# Altium PCB adua.PcbDoc
Units mm, origin at the board's own origin, x right, y up, seen from the top; angles counter-clockwise.
Board outline 234.8 x 151.35 mm, 2 copper layers (Top Layer, Bottom Layer); 68 components, 82 nets, 314 pads, 0 vias.
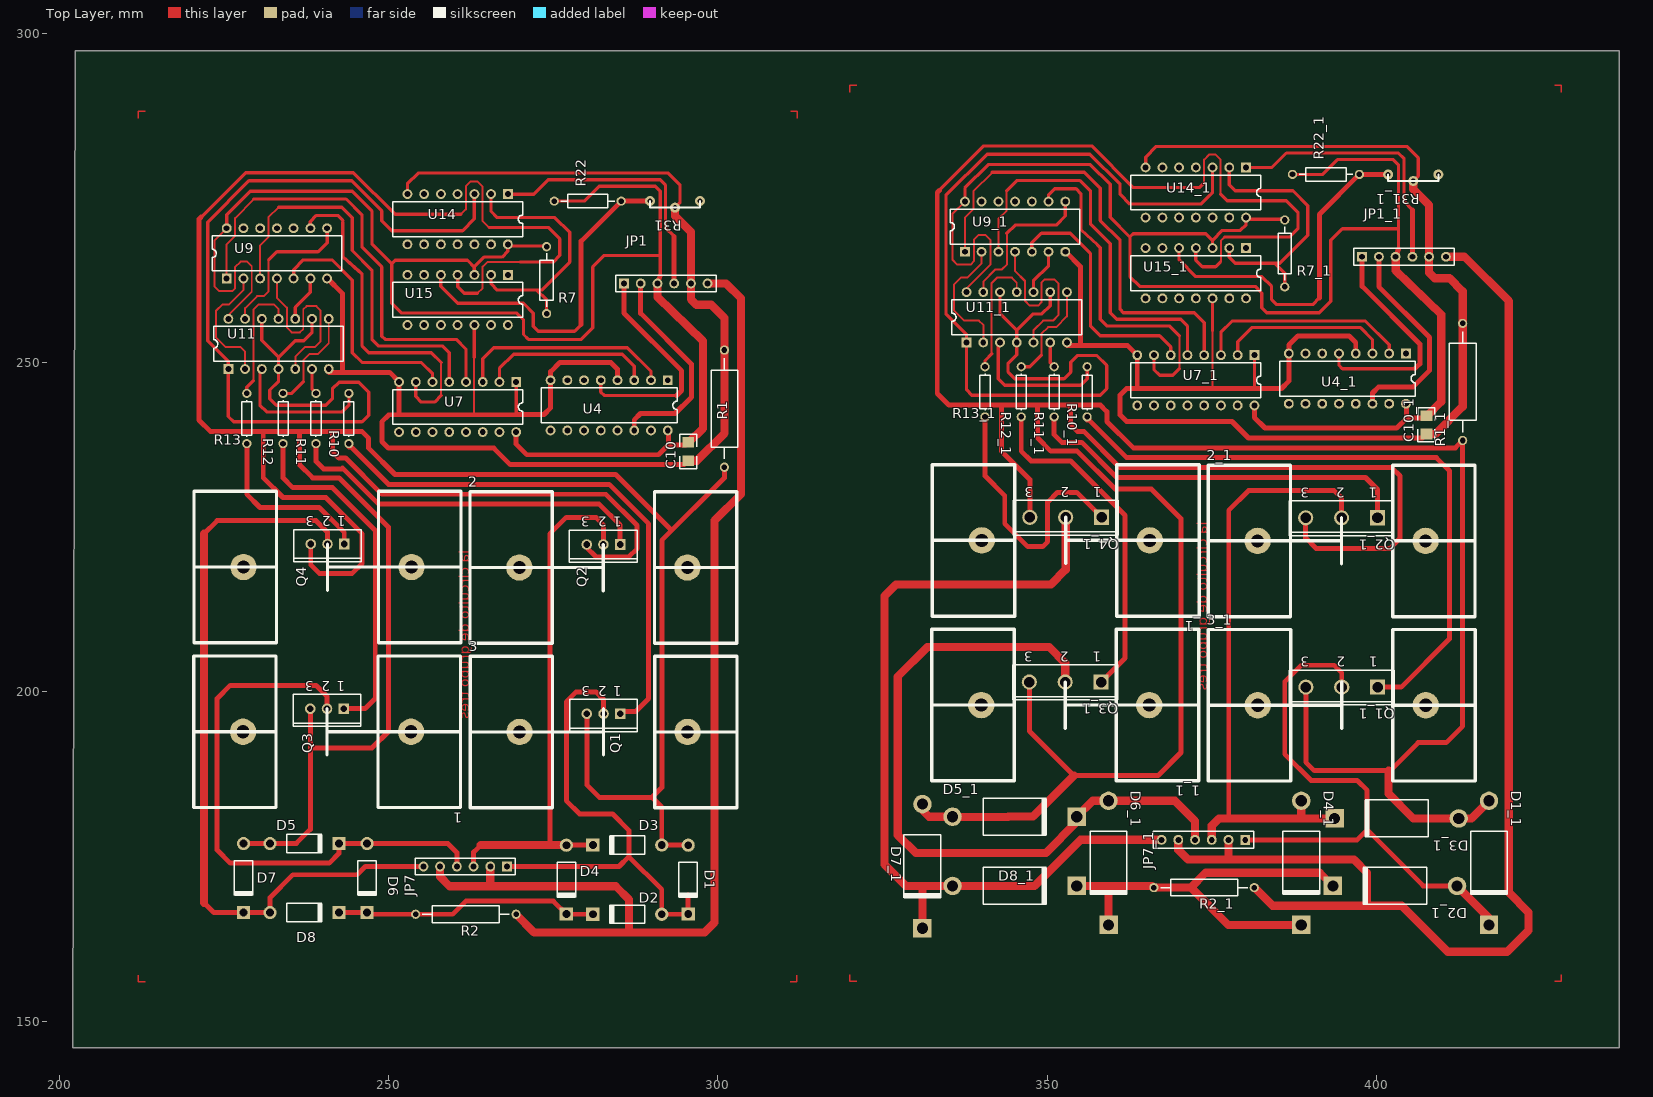
[diagram p0: Top Layer view]
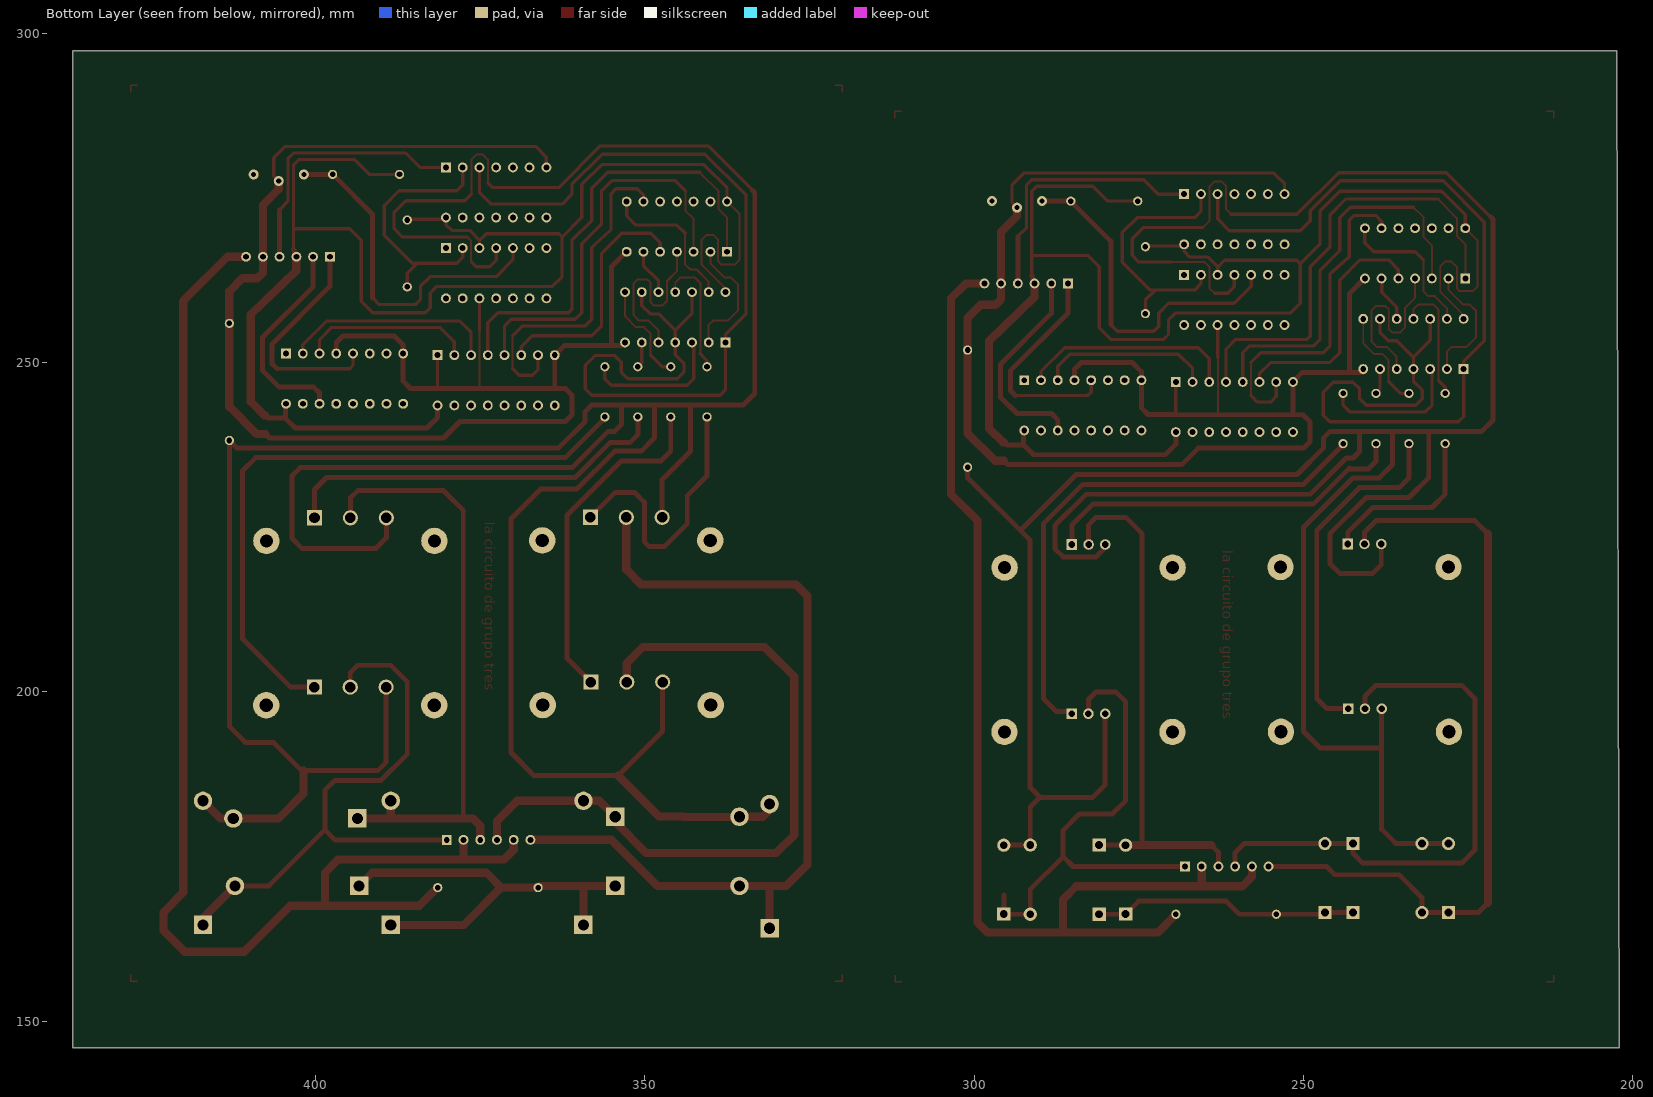
[diagram p1: Bottom Layer view, seen from below]

## Layer stack, top to bottom
Top Layer: signal copper 0.0356
Dielectric: dielectric 0.32, FR-4, Dk 4.8
Bottom Layer: signal copper 0.0356

## Board outline
202.45,297.35 436.85,297.35 436.85,146 202.05,146

## Design rules (kind name [scope] priority, off if disabled: settings)
Clearance [All] p1: gap=0.254
ComponentClearance [All] p1: gap=0.254 collisioncheckmode=0
PolygonConnect [All] p1: connectstyle=Relief reliefconductorwidth=0.254 reliefentries=4 polygonreliefangle="90 Angle"
RoomDefinition Driver [InComponentClass('Driver')] p1: confinementstyle=ConfineIn formatcopy=TRUE outline 225.262,383.686 276.062,383.686 276.062,409.086 225.262,409.086
RoutingLayers [All] p1: top layer=Any bottom layer="Not Used"
RoutingVias [All] p1: holewidth=0.711 width=1.27 viastyle="Through Hole" minholewidth=0.711 minwidth=1.27 maxholewidth=0.711 maxwidth=1.27
SolderMaskExpansion [All] p1: expansion=0.102
TestPointUsage [All] p1: valid=0 allowmultiple=FALSE
Testpoint [All] p1: side=15 testpointundercomponent=TRUE minsize=1.016 maxsize=2.54 preferedsize=1.524 minholesize=0 maxholesize=1.016 preferedholesize=0.813 testpointgrid=0.025 style=1023 order=-539222988
Width [All] p1: maxlimit=25 minlimit=0.254 preferedwidth=0.254 toplayer_prefwidth=0.5 bottomlayer_maxwidth=2.54 minimp=50.000000 maximp=50.000000 favimp=50.000000
16 further rules are at their usual default settings.

## Classes and differential pairs
component class Driver: B1A B1B B2A B2B B3A B3B C1 C4 C5 C11 C12 D1 D2 D3 D4 D5 D6 D7 D8 JP1 JP4 JP7 Q1 Q2 Q3 Q4 R1 R2 R7 R9 R10 R11 R13 R25 R26 R27 R28 R29 R30 R31 R34 S1 U1 U4 U7 U9 U11 U14 U15 U16 U? X1

## Components (designator, comment, footprint, x,y, rotation, side; value= is the part's Value field where it differs from the comment)
1 "" "Heat Sink" 263.425,203.95 r180 top
1_1 "" "Heat Sink" 375.475,208 r180 top
2 "" "Heat Sink" 259.875,208.875 r0 top
2_1 "" "Heat Sink" 371.925,212.925 r0 top
3 "" "Heat Sink" 259.9,183.925 r0 top
3_1 "" "Heat Sink" 371.95,187.975 r0 top
_1 "" "Heat Sink" 375.55,233 r180 top
C10 "XTAL" C3216-1206 295.5,236.5 r90 top
C10_1 "XTAL" C3216-1206 407.55,240.55 r90 top
D1 "1N4004" DIO10.46-5.3x2.8 295.5,171.5 r270 top
D1_1 "" DIO18.84-9.6x5.6 417.05,174.05 r270 top
D2 "1N4004" DIO10.46-5.3x2.8 286.25,166.25 r180 top
D2_1 "" DIO18.84-9.6x5.6 402.78,170.55 r180 top
D3 "1N4004" DIO10.46-5.3x2.8 286.25,176.75 r180 top
D3_1 "" DIO18.84-9.6x5.6 403.03,180.8 r180 top
D4 "1N4004" DIO10.46-5.3x2.8 277,171.5 r270 top
D4_1 "" DIO18.84-9.6x5.6 388.55,174.05 r270 top
D5 "1N4004" DIO10.46-5.3x2.8 237.25,176.98 r0 top
D5_1 "" DIO18.84-9.6x5.6 345.05,181.05 r0 top
D6 "1N4004" DIO10.46-5.3x2.8 246.75,171.75 r270 top
D6_1 "" DIO18.84-9.6x5.6 359.3,174.05 r270 top
D7 "1N4004" DIO10.46-5.3x2.8 228,171.75 r270 top
D7_1 "" DIO18.84-9.6x5.6 331.05,173.55 r270 top
D8 "1N4004" DIO10.46-5.3x2.8 237.25,166.5 r0 top
D8_1 "" DIO18.84-9.6x5.6 345.05,170.55 r0 top
JP1 "Header 6" HDR1X6 285.75,262 r0 top
JP1_1 "Header 6" HDR1X6 397.8,266.05 r0 top (schematic designator JP1)
JP7 "Header 6" HDR1X6 268,173.5 r180 top
JP7_1 "Header 6" HDR1X6 380.05,177.55 r180 top (schematic designator JP7)
Q1 "MJE15030" SFM-T3/X1.6V 282.65,196.675 r180 top
Q1_1 "" SFM-F3/Y2.3 394.7,200.725 r180 top
Q2 "MJE15030" SFM-T3/X1.6V 282.625,222.375 r180 top
Q2_1 "" SFM-F3/Y2.3 394.675,226.425 r180 top
Q3 "MJE15030" SFM-T3/X1.6V 240.675,197.45 r180 top
Q3_1 "" SFM-F3/Y2.3 352.725,201.5 r180 top
Q4 "MJE15030" SFM-T3/X1.6V 240.75,222.45 r180 top
Q4_1 "" SFM-F3/Y2.3 352.8,226.5 r180 top
R1 "" AXIAL-0.7 301,243 r90 top
R1_1 "" AXIAL-0.7 413.05,247.05 r90 top
R2 "" AXIAL-0.6 261.75,166.25 r0 top
R2_1 "" AXIAL-0.6 373.8,170.3 r0 top
R7 "" AXIAL-0.4 274,262.5 r90 top
R7_1 "" AXIAL-0.4 386.05,266.55 r90 top
R10 "1K" AXIAL-0.3 244,241.5 r270 top
R10_1 "1K" AXIAL-0.3 356.05,245.55 r270 top (schematic designator R10)
R11 "1K" AXIAL-0.3 239,241.5 r270 top
R11_1 "1K" AXIAL-0.3 351.05,245.55 r270 top (schematic designator R11)
R12 "1K" AXIAL-0.3 234,241.5 r270 top (schematic designator R11)
R12_1 "1K" AXIAL-0.3 346.05,245.55 r270 top (schematic designator R11)
R13 "Res1" AXIAL-0.3 228.5,241.5 r90 top
R13_1 "Res1" AXIAL-0.3 340.55,245.55 r90 top (schematic designator R13)
R22 "" AXIAL-0.4 280.25,274.5 r180 top
R22_1 "" AXIAL-0.4 392.3,278.55 r180 top
R31 "" "Var res" 293.5,273.5 r180 top
R31_1 "" "Var res" 405.55,277.55 r180 top
U4 "DM74LS191N" DIP-16 283.5,243.5 r180 top
U4_1 "DM74LS191N" DIP-16 395.55,247.55 r180 top (schematic designator U4)
U7 "SN74LS139AN" DIP-16/X1.5 260.5,243.25 r180 top
U7_1 "SN74LS139AN" DIP-16/X1.5 372.55,247.3 r180 top (schematic designator U7)
U9 "SN74LS04N" DIP-14/D19.7 233.068,266.568 r0 top
U9_1 "SN74LS04N" DIP-14/D19.7 345.118,270.618 r0 top (schematic designator U9)
U11 "SN74LS08N" DIP-14/D19.7 233.318,252.818 r0 top
U11_1 "SN74LS08N" DIP-14/D19.7 345.368,256.868 r0 top (schematic designator U11)
U14 "SN74LS08N" DIP-14/D19.7 260.5,271.75 r180 top
U14_1 "SN74LS08N" DIP-14/D19.7 372.55,275.8 r180 top (schematic designator U14)
U15 "LM339N" DIP-14/D19.7 260.5,259.5 r180 top
U15_1 "LM339N" DIP-14/D19.7 372.55,263.55 r180 top (schematic designator U15)
? "" "Heat Sink" 263.5,228.95 r180 top

## Footprints (in the part's own frame and the unit in brackets; to place one, negate y for a bottom-side part, rotate by r counter-clockwise, add the part's x,y. Pads: shape width x height; smd on the part's side, far side on the other; paste and mask are expansions set on the pad)
AXIAL-0.3 [mm]
  round 1.4 hole 0.85: 1(-3.81,0) 2(3.81,0)
  silkscreen extent -2.77,-0.76 2.77,0.76
AXIAL-0.4 [mm]
  round 1.4 hole 0.85: 1(-5.08,0) 2(5.08,0)
  silkscreen extent -4.06,-1.02 4.06,1.02
AXIAL-0.6 [mm]
  round 1.4 hole 0.85: 1(-7.62,0) 2(7.62,0)
  silkscreen extent -6.6,-1.27 6.6,1.27
AXIAL-0.7 [mm]
  round 1.4 hole 0.85: 1(-8.89,0) 2(8.89,0)
  silkscreen extent -7.62,-2.03 7.62,2.03
C3216-1206 [mm]
  rect 1.6x1.8 smd: 1(-1.4,0) 2(1.4,0)
  silkscreen extent -2.6,-1.3 2.6,1.3
DIO10.46-5.3x2.8 [mm]
  round 2 hole 1.2: 1(-5.23,0)
  rect 2x2 hole 1.2: 2(5.23,0)
  silkscreen extent -2.65,-1.4 2.75,1.4
DIO18.84-9.6x5.6 [mm]
  round 2.8 hole 1.7: 1(-9.42,0)
  rect 2.8x2.8 hole 1.7: 2(9.42,0)
  silkscreen extent -4.8,-2.8 4.9,2.8
DIP-14/D19.7 [mm]
  rect 1.5x1.5 hole 0.9: 1(-7.62,-3.81)
  round 1.5 hole 0.9: 2(-5.08,-3.81) 3(-2.54,-3.81) 4(0,-3.81) 5(2.54,-3.81) 6(5.08,-3.81) 7(7.62,-3.81) 8(7.62,3.81) 9(5.08,3.81) 10(2.54,3.81) 11(0,3.81) 12(-2.54,3.81) 13(-5.08,3.81) 14(-7.62,3.81)
  silkscreen extent -9.85,-2.65 9.85,2.65
DIP-16 [mm]
  rect 1.5x1.5 hole 0.9: 1(-8.89,-3.81)
  round 1.5 hole 0.9: 2(-6.35,-3.81) 3(-3.81,-3.81) 4(-1.27,-3.81) 5(1.27,-3.81) 6(3.81,-3.81) 7(6.35,-3.81) 8(8.89,-3.81) 9(8.89,3.81) 10(6.35,3.81) 11(3.81,3.81) 12(1.27,3.81) 13(-1.27,3.81) 14(-3.81,3.81) 15(-6.35,3.81) 16(-8.89,3.81)
  silkscreen extent -10.3,-2.65 10.3,2.65
DIP-16/X1.5 [mm]
  rect 1.5x1.5 hole 0.9: 1(-8.89,-3.81)
  round 1.5 hole 0.9: 2(-6.35,-3.81) 3(-3.81,-3.81) 4(-1.27,-3.81) 5(1.27,-3.81) 6(3.81,-3.81) 7(6.35,-3.81) 8(8.89,-3.81) 9(8.89,3.81) 10(6.35,3.81) 11(3.81,3.81) 12(1.27,3.81) 13(-1.27,3.81) 14(-3.81,3.81) 15(-6.35,3.81) 16(-8.89,3.81)
  silkscreen extent -9.85,-2.65 9.85,2.65
HDR1X6 [mm]
  rect 1.5x1.5 hole 0.9: 1(0,0)
  round 1.5 hole 0.9: 2(2.54,0) 3(5.08,0) 4(7.62,0) 5(10.16,0) 6(12.7,0)
  silkscreen extent -1.27,-1.27 13.97,1.27
"Heat Sink" [mm]
  round 4 hole 2: 0(35.5,10) 2(10,10)
  silkscreen extent 2.5,-1.5 43,21.5
SFM-F3/Y2.3 [mm]
  rect 2.3x2.3 hole 1.6: 1(-5.45,0)
  round 2.3 hole 1.6: 2(0,0) 3(5.45,0)
  silkscreen extent -7.95,-2.6 7.95,2.7
SFM-T3/X1.6V [mm]
  rect 1.6x1.6 hole 1: 1(-2.54,0)
  round 1.6 hole 1: 2(0,0) 3(2.54,0)
  silkscreen extent -5.15,-2.2 5.15,2.7
"Var res" [mil]
  round 60 hole 30: 0(0,0) 1(-149.61,-39.37) 2(149.61,-39.37)
  silkscreen extent -150,-39 150,0

## Part data
D1 D2 D3 D4 D5 D6 D7 D8: "1.0 Ampere General Purpose Rectifier"
D1_1 D2_1 D3_1 D4_1 D5_1 D6_1 D7_1 D8_1: library part 1N5404
JP1 JP1_1 JP7 JP7_1: "Header, 6-Pin"
Q1 Q2 Q3 Q4: "Complementary Silicon Plastic Power Transistor"
R10 R10_1: library part Res1, "Resistor"
R11 R11_1 R12 R12_1: library part res1, "Resistor"
R13 R13_1: "Resistor"
U4 U4_1: "Synchronous 4-Bit Up/Down Counter with Mode Control"
U7 U7_1: "Dual 2-Line to 4-Line Decoder / Demultiplexer"
U9 U9_1: "Hex Inverter"
U11 U11_1 U14 U14_1: "Quadruple 2-Input Positive-AND Gate"
U15 U15_1: "Quad Single-Supply Comparator"

## Nets (pads, with @x,y where several pads share a name; then routed paths per layer and width w, separated by ;. In a path a pad name is that pad's centre, name@x,y a point inside that pad or via, vN(x,y) a via of type N, cw(c..) or ccw(c..) an arc to the next point about the centre after c; other vN are vias at no path point)
+5V: 
+5V: 
+5V: 
+5V: 
+5V: 
+5V: 
+5V: 
+5V: 
+12V: JP1.6 JP7.2 JP7.5 R2.2 | length 173.9
  Top Layer w1.25: JP7.5 257.84,171.96 259.3,170.5 284.5,170.5 286.5,168.5 286.5,163.5 ; 265.46,170.51 JP7.2 ; R2.2 272.12,163.5 298,163.5 299.5,165 299.5,226 303.5,230 303.5,259.75 301.25,262 JP1.6
+12V: 
+12V: 
+12V: 
+12V: 
+12V: 
+12V: 
+12V: 
+12V: 
"CLOCK PIC1": 
"COIL OFF": JP1.4 U14.1 | length 40.7
  Top Layer w0.5: U14.1 272.06,275.56 274.25,277.75 291.25,277.75 292.05,276.95 292.05,270.45 293.37,269.13
  Top Layer w0.75: JP1.4 293.37,269.13
"DATA IN PIC1": 
"DATA OUT PIC1": 
GND: C10.1 JP1.5 R1.2 R31.0 U4.4 U4.8 U7.1 U7.8 U9.7 U11.7 U14.7 U15.12 | length 241.1
  Top Layer w0.3: U11.7 U11.7@240.938,249.188 ; 263,242.25 263,250.75
  Top Layer w0.5: U11.7@240.938,248.948 U11.7 ; U14.7 252.88,277.13 254.5,278.75 292.5,278.75 294.25,277 294.25,274.25 R31.0 ; U15.12@262.54,255.69 262.81,255.69 U15.12@263,255.5 ; 263.04,250.79 U15.12 ; 269.39,242.11 U7.1
  Top Layer w0.75: U9.7 240.742,262.758 243,260.5 243,248.5 ; U11.7 240.938,248.562 241,248.5 250.17,248.5 U7.8 251.61,242.11 ; U4.4 284.77,248.98 283.75,250 276,250 274.61,248.61 274.61,243.11 273.61,242.11 269.39,242.11 250,242 249,241 249,238 250,237 266,237 268.5,234.5 294.9,234.5 C10.1
  Top Layer w1.25: R31.0 293.5,272.25 295.91,269.84 JP1.5 295.91,259.59 296.75,258.75 299,258.75 301,256.75 301,239.25 296.85,235.1 C10.1
"HOME PIC1": 
NetB1A_1: D3.2 D4.1 JP7.3 Q2.2 | length 80.6
  Top Layer w0.75: JP7.3 262.92,175.67 263,175.75 264,176.75 ; 274.5,176.75 274.5,224 277,226.5 281.5,226.5 282.625,225.375 Q2.2 ; D4.1 277,176.75 D3.2
  Top Layer w1.25: 264,176.75 276.98,176.75 D4.1
NetB1A_2: D1.2 D2.1 JP7.1 Q1.2 | length 76.2
  Top Layer w0.75: JP7.1 285,173.5 286.5,175 ; Q1.2 282.65,198.85 281.5,200 278.5,200 277,198.5 277,183.5 279,181.5 284,181.5 286.5,179 286.5,175 ; 295.5,169.2 D1.2 295.48,166.25 D2.1 291.48,170.02 286.5,175
NetB1B_1: D7.2 D8.1 JP7.6 Q4.2 | length 116.3
  Top Layer w0.75: 222,168 223.48,166.52 232,166.52 D8.1 232.02,168.77 235.5,172.25 245.25,172.25 246.5,173.5 JP7.6 ; 222,224 224,226 239,226 240.75,224.25 Q4.2
  Top Layer w1.25: 222,168 222,224
NetB1B_2: D5.2 D6.1 JP7.4 Q3.2 | length 85.1
  Top Layer w0.75: Q3.2 240.675,199.325 239,201 226,201 224,199 224,176 226,174 241,174 242.48,175.48 D5.2 259.02,176.98 260.38,175.62 JP7.4
NetC4_2: 
NetC5_2: 
NetD1_1: D1.1 D3.1 D5.1 D7.1 Q1.3 Q2.3 Q3.3 Q4.3 R1.1 U15.4 | length 498.3
  Top Layer w0.3: 261,272.5 261.75,273.25 261.75,276.75 262.5,277.5 263.5,277.5 264.3,276.7 264.3,271.45 265.25,270.5 ; 263.5,260.5 264.3,261.3 264.3,264.55 265,265.25 270,265.25
  Top Layer w0.5: 221.568,272.068 228.318,278.818 244.682,278.818 251,272.5 261,272.5 ; U15.4 260.5,261.5 261.5,260.5 263.5,260.5 ; 265.25,270.5 274.25,270.5 276,268.75 276,266.25 275,265.25 270,265.25
  Top Layer w0.75: 221.568,272.068 221.25,271.75 221.25,241.25 223,239.5 246,239.5 247,238.5 247,237 251,233 284.5,233 293,224.5 ; D7.1 D5.1 232.02,177.02 236.02,177.02 238.135,179.135 Q3.3 ; 231,239.5 231,232.5 234,229.5 240.5,229.5 246,224 246,219.5 244.5,218 239.5,218 238.21,219.29 Q4.3 ; 236.5,239.5 236.5,234.5 238.5,232.5 242.5,232.5 250,225 250,194 247.5,191.5 238.135,191.5 ; 241.5,239.5 241.5,236.5 242.5,235.5 243.5,235.5 249,230 283,230 287.75,225.25 287.75,221.75 286.5,220.5 281.5,220.5 279.96,222.04 Q2.3@279.96,222.5 ; Q1.3 280.11,185.89 282,184 290,184 ; D1.1@295.48,176.75 D3.1 291.48,182.52 290,184 ; D1.1 D1.1@295.5,176.75 ; R1.1 301,232.5 291.5,223 291.5,185.5 290,184
NetD2_2: D2.2 D4.2 D6.2 D8.2 R2.1 | length 41
  Top Layer w0.75: D8.2 D6.2@246.73,166.5 ; R2.1@253.88,166.5 R2.1 ; D2.2 277.02,166.25 275.02,168.25 261.75,168.25 259.75,166.25 D6.2@246.98,166.25 ; D6.2@246.73,166.5 D6.2@246.98,166.25 ; D6.2@246.73,166.5 D6.2@246.98,166.25
NetJP4_1: 
NetJP4_2: 
NetJP4_3: 
NetJP4_4: 
NetJP4_5: 
NetQ1_1: Q1.1 R10.2 | length 81.7
  Top Layer w0.75: R10.2@244,237.19 244.31,237.19 250,231.5 283.5,231.5 289.5,225.5 289.5,199 287.5,197 Q1.1@285.5,197
NetQ1_2: 
NetQ2_1: Q2.1 R11.2 | length 56.1
  Top Layer w0.75: R11.2 239,235 240.169,233.831 243.169,233.831 ; 243,234 248.5,228.5 282,228.5 285.165,225.335 Q2.1
NetQ2_2: 
NetQ3_1: Q3.1 R12.2 | length 53.4
  Top Layer w0.75: R12.2 234,232.5 235.5,231 241.5,231 248,224.5 248,199 246.45,197.45 Q3.1
NetQ3_2: 
NetQ4_1: Q4.1 R13.1 | length 26.6
  Top Layer w0.75: R13.1 228.5,230 230.5,228 239.5,228 243.29,224.21 Q4.1
NetQ4_2: 
NetQ6_2: 
NetQ7_2: 
NetQ8_2: 
NetQ10_2: 
NetQ11_2: 
NetQ12_2: 
NetR7_1: R7.1 U14.2 U15.2 | length 40
  Top Layer w0.5: U15.2 265.58,261.92 266.5,261 273.25,261 277.5,265.25 277.5,269.75 275.25,272 266.5,272 265.58,272.92 U14.2 ; 272.5,261 274,259.5 R7.1
NetR10_1: R10.1 U11.3 | length 22.2
  Top Layer w0.5: U11.3@230.5,249 230.508,249.008 U11.3 ; U11.3@230.778,248.858 U11.3 ; R10.1 244,243.5 243,242.5 231.5,242.5 230.5,243.5 230.5,248.73 U11.3
NetR11_1: R11.1 U11.6 | length 3.9
  Top Layer w0.5: U11.6 238.398,245.912 R11.1
NetR12_1: R12.1 U11.8 | length 15.7
  Top Layer w0.3: 237.1,247.1 237.1,250.35 238.068,251.318 239.318,251.318 240.938,252.938 U11.8
  Top Layer w0.5: R12.1 235.31,245.31 236.75,246.75 237.1,247.1
NetR13_2: R13.2 U11.11 | length 19
  Top Layer w0.3: 229.5,247.25 229.5,258 230.318,258.818 232.568,258.818 233.318,258.068 U11.11
  Top Layer w0.5: R13.2@228.476,245.31 R13.2 228.5,246.25 229.5,247.25
NetR22_1: 
NetR22_1: R22.1 R31.2 U15.5 | length 53.1
  Top Layer w0.5: U15.5 257.96,261.54 260.5,259 270.5,259 272,257.5 272,255.5 272.75,254.75 278.25,254.75 279.25,255.75
  Top Layer w0.75: 279.25,255.75 279.25,268.42 R22.1 R31.2
NetR25_1: 
NetR26_1: 
NetR27_1: 
NetR28_1: 
NetU1_10: JP1.2 U4.14 | length 32.2
  Top Layer w0.75: U4.14 287.31,241.31 288.25,242.25 293.5,242.25 296,244.75 296,249.75 288.29,257.46 JP1.2
NetU1_11: JP1.1 U4.5 | length 34.5
  Top Layer w0.3: U4.5@281.73,247.52 U4.5@281.73,247.56
  Top Layer w0.5: U4.5 282.23,245.52 282.75,245 293.75,245
  Top Layer w0.75: JP1.1 285.75,257.5 294.5,248.75 294.5,245.75 293.75,245
NetU4_2: U4.2 U7.3 | length 32.6
  Top Layer w0.5: U7.3 264.31,250.56 266,252.25 286.25,252.25 289.85,248.65 U4.2
NetU4_3: U4.3 U7.2 | length 26.3
  Top Layer w0.5: U7.2 266.85,249.1 269,251.25 285.5,251.25 287.31,249.44 U4.3
NetU7_4: U7.4 U9.1 | length 69.4
  Top Layer w0.3: U9.1 225.448,267.948 226.718,269.218 226.718,271.918 229.568,274.768 229.568,274.818
  Top Layer w0.5: 229.568,274.818 243.568,274.818 246,272.386 246,267.5 249,264.5 249,254 249.5,253.5 260.27,253.5 261.77,252 U7.4
NetU7_5: U7.5 U9.3 | length 60.5
  Top Layer w0.3: U9.3 230.528,267.778 231.768,269.018 231.768,272.018 233.318,273.568
  Top Layer w0.5: 233.318,273.568 242.932,273.568 244.5,272 244.5,267 247.5,264 247.5,253.5 248.5,252.5 258.23,252.5 259.23,251.5 U7.5
NetU7_6: U7.6 U9.5 | length 37.9
  Top Layer w0.5: U9.5 235.608,264.108 237.068,265.568 241.432,265.568 244.5,262.5 244.5,251.5 246,250 255,250 256.69,248.31 U7.6
NetU7_7: U7.7 U9.9 | length 51.6
  Top Layer w0.3: 258,245 258,250
  Top Layer w0.5: U9.9 238.148,271.398 239.068,272.318 242.318,272.318 243.068,271.568 ; 243.068,271.318 243.068,266.068 245.568,263.818 246,263.386 246,252.5 247,251.5 256.5,251.5 258,250 ; U7.7 254.15,244.85 255,244 257,244 258,245
NetU9_2: U9.2 U11.2 | length 19.2
  Top Layer w0.3: U9.2 227.988,260.988 225.818,258.818 224.818,258.818 223.818,257.818 223.818,253.818 225.318,252.318 227.568,252.318 228.238,251.648 U11.2
NetU9_4: U9.4 U11.5 | length 28.6
  Top Layer w0.3: U9.4 233.068,259.818 234.568,258.318 234.568,255.318 235.318,254.568 236.568,254.568 237.068,255.068 237.068,258.068 237.568,258.568 239.068,258.568 239.068,258.518 239.668,257.918 239.668,253.168 238.818,252.318 237.318,252.318 235.858,250.858 U11.5
NetU9_6: U9.6 U11.10 | length 7.4
  Top Layer w0.3: U11.10@235.508,256.628 U11.10
  Top Layer w0.5: U11.10 235.858,258.358 238.148,260.648 U9.6
NetU9_8: U9.8 U11.13 | length 23.2
  Top Layer w0.3: U11.13 228.238,258.238 230.068,260.068 231.068,260.068 231.818,260.818 231.818,265.568
  Top Layer w0.5: 231.818,265.568 233.068,266.818 239.318,266.818 240.688,268.188 U9.8
NetU11_1: U11.1 U11.4 U11.9 U11.12 U14.3 | length 148.7
  Top Layer w0.5: U11.12 230.778,253.358 233.318,250.818 ; U11.9 238.398,254.568 237.148,253.318 235.818,253.318 233.318,250.818 ; U14.3 263.04,271.79 261.25,270 250.5,270 249,271.5 249,273 244.432,277.568 228.818,277.568 222.568,271.318 222.568,253.318 225.698,250.188 225.698,241.802 226.5,241 246,241 247,242 247,245.5 245.5,247 242.5,247 241.5,246 241.5,244.5 240.5,243.5 233,243.5 232,244.5 232,245.826 233.318,247.144 U11.4 233.318,250.818
"RESET PIC1": 
"STATUS PIC1": 
VCC: 
VDD: 
VDD: 
VDD: 
VDD: 
VDD: C10.2 JP1.3 R7.2 R22.2 U4.16 U7.16 U9.14 U11.14 U14.14 U15.3 | length 244.5
  Top Layer w0.3: U9.14@225.128,270.378 U9.14@225.128,270.508 ; U9.14 223.568,268.498 223.568,261.568 224.318,260.818 226.318,260.818 226.7,261.2 226.7,264.45 227.568,265.318 228.568,265.318 229.25,264.636 229.25,260.75 225.698,257.198 U11.14
  Top Layer w0.5: U9.14 225.448,272.448 229,276 244.5,276 247.5,273 247.5,268 250.5,265 ; U15.3 263.04,264.54 264.5,266 267.25,266 268.12,266.87 U14.14 ; 263.04,264.46 262,265.5 251,265.5 250.5,265 ; U14.14@268.12,267.69 R7.2@273.89,267.69 ; R22.2 279.75,274.5 282,276.75 290.5,276.75 291.25,276 291.25,263.182 ; 291.25,266.25 282.75,266.25 281,264.5 281,255.25 279.25,253.5 271.25,253.5 270.5,254.25 270.5,256.5 269.5,257.5 252,257.5 250.5,259 250.5,265
  Top Layer w0.75: U7.16 269.39,237.61 271,236 291,236 292.5,237.5 ; JP1.3 291.25,263.182 ; U4.16@292.5,239.5 292.5,237.5 ; C10.2 295.1,237.5 292.5,237.5
  Top Layer w1.25: JP1.3 290.83,259.92 297.75,253.25 297.75,240 295.65,237.9 C10.2
pads on no net: 1.0 1.2 1_1.0 1_1.2 2.0 2.2 2_1.0 2_1.2 3.0 3.2 3_1.0 3_1.2 ?.0 ?.2 _1.0 _1.2 C10_1.1 C10_1.2 D1_1.1 D1_1.2 D2_1.1 D2_1.2 D3_1.1 D3_1.2 D4_1.1 D4_1.2 D5_1.1 D5_1.2 D6_1.1 D6_1.2 D7_1.1 D7_1.2 D8_1.1 D8_1.2 JP1_1.1 JP1_1.2 JP1_1.3 JP1_1.4 JP1_1.5 JP1_1.6 JP7_1.1 JP7_1.2 JP7_1.3 JP7_1.4 JP7_1.5 JP7_1.6 Q1_1.1 Q1_1.2 Q1_1.3 Q2_1.1 Q2_1.2 Q2_1.3 Q3_1.1 Q3_1.2 Q3_1.3 Q4_1.1 Q4_1.2 Q4_1.3 R1_1.1 R1_1.2 R2_1.1 R2_1.2 R7_1.1 R7_1.2 R10_1.1 R10_1.2 R11_1.1 R11_1.2 R12_1.1 R12_1.2 R13_1.1 R13_1.2 R22_1.1 R22_1.2 R31.1 R31_1.0 R31_1.1 R31_1.2 U4.1 U4.6 U4.7 U4.9 U4.10 U4.11 U4.12 U4.13 U4.15 U4_1.1 U4_1.2 U4_1.3 U4_1.4 U4_1.5 U4_1.6 U4_1.7 U4_1.8 U4_1.9 U4_1.10 U4_1.11 U4_1.12 U4_1.13 U4_1.14 U4_1.15 U4_1.16 U7.9 U7.10 U7.11 U7.12 U7.13 U7.14 U7.15 U7_1.1 U7_1.2 U7_1.3 U7_1.4 U7_1.5 U7_1.6 U7_1.7 U7_1.8 U7_1.9 U7_1.10 U7_1.11 U7_1.12 U7_1.13 U7_1.14 U7_1.15 U7_1.16 U9.10 U9.11 U9.12 U9.13 U9_1.1 U9_1.2 U9_1.3 U9_1.4 U9_1.5 U9_1.6 U9_1.7 U9_1.8 U9_1.9 U9_1.10 U9_1.11 U9_1.12 U9_1.13 U9_1.14 U11_1.1 U11_1.2 U11_1.3 U11_1.4 U11_1.5 U11_1.6 U11_1.7 U11_1.8 U11_1.9 U11_1.10 U11_1.11 U11_1.12 U11_1.13 U11_1.14 U14.4 U14.5 U14.6 U14.8 U14.9 U14.10 U14.11 U14.12 U14.13 U14_1.1 U14_1.2 U14_1.3 U14_1.4 U14_1.5 U14_1.6 U14_1.7 U14_1.8 U14_1.9 U14_1.10 U14_1.11 U14_1.12 U14_1.13 U14_1.14 U15.1 U15.6 U15.7 U15.8 U15.9 U15.10 U15.11 U15.13 U15.14 U15_1.1 U15_1.2 U15_1.3 U15_1.4 U15_1.5 U15_1.6 U15_1.7 U15_1.8 U15_1.9 U15_1.10 U15_1.11 U15_1.12 U15_1.13 U15_1.14
copper on no net: | length 2748.2
  Top Layer w0.2: 212.05,157 212.05,156 213.05,156 ; 212.05,287.1 212.05,288.1 213.05,288.1 ; 311,156 312,156 312,157 ; 311.05,288.1 312.05,288.1 312.05,287.1 ; 320.05,157.05 320.05,156.05 321.05,156.05 ; 320.05,291.05 320.05,292.05 321.05,292.05 ; 427.05,156.05 428.05,156.05 428.05,157.05 ; 427.05,292.05 428.05,292.05 428.05,291.05
  Top Layer w0.3: 337.178,274.428 337.178,274.558 ; 337.498,266.808 337.498,271.998 338.768,273.268 338.768,275.968 341.618,278.818 341.618,278.868 ; 337.498,274.428 335.618,272.548 335.618,265.618 336.368,264.868 338.368,264.868 338.868,265.368 338.868,268.618 339.618,269.368 340.618,269.368 341.368,268.618 341.368,264.868 337.748,261.248 337.748,260.678 ; 340.038,266.808 340.038,265.038 337.868,262.868 336.868,262.868 335.868,261.868 335.868,257.868 337.368,256.368 339.618,256.368 340.288,255.698 340.288,253.058 ; 340.288,260.678 340.288,262.288 342.118,264.118 343.118,264.118 343.868,264.868 343.868,269.618 ; 341.568,251.318 341.568,262.068 342.368,262.868 344.618,262.868 345.368,262.118 345.368,260.678 ; 342.578,266.808 342.578,271.828 343.818,273.068 343.818,276.068 ; 345.118,266.808 345.118,263.868 346.618,262.368 346.618,259.368 347.368,258.618 348.618,258.618 349.118,259.118 349.118,262.118 349.618,262.618 351.118,262.618 351.118,262.568 351.718,261.968 351.718,257.218 350.868,256.368 349.368,256.368 347.908,254.908 347.908,253.058 ; 347.558,260.678 347.908,260.678 ; 349.118,251.118 349.118,254.368 350.118,255.368 351.368,255.368 352.988,256.988 352.988,260.678 ; 352.988,253.058 352.988,253.238 ; 370.05,249.05 370.05,254.05 ; 373.8,277.3 373.8,280.8 374.55,281.55 375.55,281.55 376.3,280.8 376.3,275.55 ; 375.05,246.3 375.05,254.8 ; 376.35,265.35 376.35,268.45 376.95,269.05 ; 393.78,251.57 393.78,251.61
  Top Layer w0.5: 333.618,276.118 340.368,282.868 356.732,282.868 363.05,276.55 373.05,276.55 373.8,277.3 ; 337.498,274.428 337.498,276.498 341.05,280.05 356.55,280.05 359.55,277.05 359.55,272.05 362.55,269.05 ; 340.526,249.36 340.55,249.36 340.55,250.3 341.568,251.318 ; 341.618,278.868 355.618,278.868 358.05,276.436 358.05,271.55 361.05,268.55 361.05,258.05 361.55,257.55 372.32,257.55 373.82,256.05 373.82,251.11 ; 342.55,253.05 342.558,253.058 342.828,253.058 ; 342.828,252.908 342.828,253.058 ; 342.828,260.678 342.828,257.408 345.368,254.868 ; 343.818,276.068 345.368,277.618 354.982,277.618 356.55,276.05 356.55,271.05 359.55,268.05 359.55,257.55 360.55,256.55 370.28,256.55 371.28,255.55 371.28,251.11 ; 343.868,269.618 345.118,270.868 351.368,270.868 352.738,272.238 352.738,274.428 ; 346.05,249.36 347.36,249.36 349.118,251.118 ; 347.658,266.808 347.658,268.158 349.118,269.618 353.482,269.618 356.55,266.55 356.55,255.55 358.05,254.05 367.05,254.05 368.74,252.36 368.74,251.11 ; 347.908,260.678 347.908,262.408 350.198,264.698 350.198,266.808 ; 350.198,274.428 350.198,275.448 351.118,276.368 354.368,276.368 355.118,275.618 ; 350.448,253.058 350.448,249.962 351.05,249.36 ; 350.448,260.678 350.448,258.618 349.198,257.368 347.868,257.368 345.368,254.868 ; 352.988,252.998 352.988,253.058 ; 355.118,275.368 355.118,270.118 357.618,267.868 358.05,267.436 358.05,256.55 359.05,255.55 368.55,255.55 370.05,254.05 ; 356.05,249.36 356.05,247.55 355.05,246.55 343.55,246.55 342.55,247.55 342.55,252.78 342.828,253.058 ; 364.93,279.61 364.93,281.18 366.55,282.8 404.55,282.8 406.3,281.05 406.3,278.3 405.55,277.55 ; 366.2,251.11 366.2,248.9 367.05,248.05 369.05,248.05 370.05,249.05 ; 370.01,267.36 370.01,265.59 372.55,263.05 382.55,263.05 384.05,261.55 384.05,259.55 384.8,258.8 390.3,258.8 391.3,259.8 ; 372.55,267.36 372.55,265.55 373.55,264.55 375.55,264.55 376.25,265.25 ; 374.59,259.74 374.86,259.74 375.05,259.55 ; 375.09,254.84 375.09,259.74 ; 375.09,267.36 375.09,268.59 376.55,270.05 379.3,270.05 380.17,270.92 380.17,271.99 ; 375.09,268.51 374.05,269.55 363.05,269.55 362.55,269.05 ; 375.09,279.61 375.09,275.84 373.3,274.05 362.55,274.05 361.05,275.55 361.05,277.05 356.482,281.618 340.868,281.618 334.618,275.368 334.618,257.368 337.748,254.238 337.748,245.852 338.55,245.05 358.05,245.05 359.05,246.05 359.05,249.55 357.55,251.05 354.55,251.05 353.55,250.05 353.55,248.55 352.55,247.55 345.05,247.55 344.05,248.55 344.05,249.876 345.368,251.194 345.368,253.058 345.368,254.868 ; 376.3,275.55 377.3,274.55 386.3,274.55 388.05,272.8 388.05,270.3 386.8,269.05 376.95,269.05 ; 376.36,251.11 376.36,254.61 378.05,256.3 398.3,256.3 401.9,252.7 401.9,251.36 ; 377.63,267.36 377.63,265.97 378.55,265.05 385.3,265.05 389.55,269.3 389.55,273.8 387.3,276.05 378.55,276.05 377.63,276.97 377.63,279.61 ; 378.9,251.11 378.9,253.15 381.05,255.3 397.55,255.3 399.36,253.49 399.36,251.36 ; 380.17,271.74 385.94,271.74 ; 380.17,279.61 384.11,279.61 386.3,281.8 403.3,281.8 404.15,280.95 404.15,274.45 405.42,273.18 ; 381.44,246.16 381.44,251.11 ; 384.55,265.05 386.05,263.55 386.05,261.47 ; 387.22,278.55 391.8,278.55 394.05,280.8 402.55,280.8 403.3,280.05 403.3,267.232 ; 394.28,251.36 394.28,249.57 394.8,249.05 405.8,249.05 ; 403.3,270.3 394.8,270.3 393.05,268.55 393.05,259.3 391.3,257.55 383.3,257.55 382.55,258.3 382.55,260.55 381.55,261.55 364.05,261.55 362.55,263.05 362.55,269.05
  Top Layer w0.75: 333.618,276.118 333.3,275.8 333.3,245.3 335.05,243.55 358.05,243.55 359.05,242.55 359.05,241.05 363.05,237.05 411.94,237.05 413.05,238.16 413.05,194.8 410.55,192.3 406.3,192.3 402.05,188.05 390.55,188.05 389.25,189.35 389.25,200.725 ; 340.55,241.74 340.55,232.8 343.55,229.8 343.55,225.55 347.05,222.05 349.3,222.05 350.05,222.8 350.05,228.8 351.55,230.3 354.45,230.3 358.25,226.5 357.85,226.5 ; 343.05,243.55 343.05,236.55 347.35,232.25 347.35,226.5 ; 344.07,181.03 344.07,181.07 ; 346.05,241.74 346.05,236.55 347.55,235.05 353.55,235.05 361.8,226.8 361.8,205.125 358.175,201.5 ; 347.275,201.5 347.275,194.075 354.05,187.3 366.8,187.3 370.3,190.8 370.3,226.3 365.8,230.8 360.3,230.8 354.55,236.55 350.55,236.55 348.55,238.55 348.55,243.55 ; 351.05,241.74 351.05,239.05 352.219,237.881 355.219,237.881 360.55,232.55 398.3,232.55 400.125,230.725 400.125,226.425 ; 352.738,266.808 352.792,266.808 355.05,264.55 355.05,252.55 ; 352.988,253.058 352.988,252.612 353.05,252.55 362.22,252.55 363.66,251.11 363.66,246.16 ; 353.55,243.55 353.55,240.55 354.55,239.55 355.55,239.55 361.05,234.05 402.3,234.05 403.55,232.8 403.55,223.3 402.05,221.8 390.8,221.8 389.225,223.375 389.225,226.425 ; 356.05,241.24 356.36,241.24 362.05,235.55 409.05,235.55 411.05,233.55 411.05,208.05 403.725,200.725 400.15,200.725 ; 365.93,170.55 366.18,170.3 ; 377.55,180.8 377.55,227.55 380.55,230.55 393.55,230.55 394.675,229.425 394.675,226.425 ; 380.05,177.55 397.05,177.55 398.55,179.05 ; 381.44,243.49 381.44,241.66 383.05,240.05 403.05,240.05 404.55,241.55 ; 391.3,259.8 391.3,272.47 397.38,278.55 401.75,278.55 ; 394.7,200.725 394.7,202.9 393.55,204.05 388.55,204.05 386.05,201.55 386.05,190.55 390.05,186.55 397.05,186.55 398.55,185.05 398.55,179.05 ; 396.82,251.36 396.82,253.03 395.8,254.05 388.05,254.05 386.66,252.66 386.66,247.16 385.55,246.05 362.05,246.05 361.05,245.05 361.05,242.05 362.05,241.05 378.05,241.05 380.55,238.55 406.95,238.55 407.55,239.15 ; 397.8,266.05 397.8,261.55 406.55,252.8 406.55,249.8 405.8,249.05 ; 399.36,243.74 399.36,245.36 400.3,246.3 405.55,246.3 408.05,248.8 408.05,253.8 400.34,261.51 400.34,266.05 ; 402.88,266.05 403.3,267.232 ; 404.55,243.55 404.55,241.55 ; 405.42,266.05 405.42,273.18 ; 407.55,180.78 407.55,180.8 ; 407.55,241.95 407.15,241.55 404.55,241.55 ; 412.2,170.55 407.05,170.55 398.55,179.05
  Top Layer w1.25: 331.05,164.13 331.05,170.55 ; 331.05,182.97 331.05,182.05 332.05,181.05 335.63,181.05 335.65,181.03 344.07,181.03 ; 344.07,181.07 347.82,181.07 354.05,187.3 ; 352.725,201.5 352.725,204.375 350.3,206.8 331.8,206.8 327.3,202.3 327.3,178.3 330.05,175.55 349.8,175.55 354.47,180.22 354.47,181.05 356.89,183.47 369.38,183.47 372.43,180.42 372.43,177.55 ; 352.8,226.5 352.8,218.55 350.55,216.3 327.05,216.3 325.3,214.55 325.3,173.8 328.55,170.55 348.05,170.55 355.05,177.55 367.35,177.55 ; 354.47,170.55 365.93,170.55 366.18,170.3 371.8,170.3 ; 359.3,164.63 359.3,170.55 ; 369.89,177.55 369.89,176.01 371.35,174.55 396.55,174.55 398.55,172.55 398.55,167.55 ; 374.97,177.88 374.97,179.72 376.05,180.8 388.55,180.8 ; 377.51,174.56 377.51,177.55 ; 381.42,170.3 384.17,167.55 403.8,167.55 410.8,160.55 419.8,160.55 423.05,163.8 423.05,166.55 420.05,169.55 420.05,259.3 413.3,266.05 410.5,266.05 ; 388.55,164.63 377.47,164.63 371.8,170.3 ; 388.55,183.47 388.55,180.8 ; 393.05,170.55 393.36,170.55 391.36,172.55 374.05,172.55 371.8,170.3 ; 393.61,180.8 388.55,180.8 ; 401.8,188.05 401.8,184.55 405.55,180.8 412.45,180.8 414.38,180.8 417.05,183.47 ; 402.88,266.05 402.88,263.97 409.8,257.3 409.8,244.05 407.7,241.95 407.55,241.95 ; 405.55,277.55 405.55,276.3 407.96,273.89 407.96,266.05 407.96,263.64 408.8,262.8 411.05,262.8 413.05,260.8 413.05,243.3 408.9,239.15 407.55,239.15 ; 412.2,170.55 417.05,165.7 417.05,164.63

## Other copper
Top Layer:
  text "la circuito de grupo tres" at 374.3,225.8 h1.52 r90
  text "la circuito de grupo tres" at 262.25,221.5 h1.52 r90

## Text inside footprints (layer, text, board x,y; h text height)
Q1: Top Overlay "3" at 280.61,200.85 h1.5 r180; Top Overlay "2" at 283.15,200.85 h1.5 r180; Top Overlay "1" at 285.44,200.85 h1.5 r180
Q1_1: Top Overlay "1" at 400.15,205.3 h1.5 r180; Top Overlay "2" at 395.208,205.3 h1.5 r180; Top Overlay "3" at 389.758,205.3 h1.5 r180
Q2: Top Overlay "1" at 285.415,226.55 h1.5 r180; Top Overlay "2" at 283.125,226.55 h1.5 r180; Top Overlay "3" at 280.585,226.55 h1.5 r180
Q2_1: Top Overlay "1" at 400.125,231 h1.5 r180; Top Overlay "2" at 395.183,231 h1.5 r180; Top Overlay "3" at 389.733,231 h1.5 r180
Q3: Top Overlay "1" at 243.465,201.625 h1.5 r180; Top Overlay "2" at 241.175,201.625 h1.5 r180; Top Overlay "3" at 238.635,201.625 h1.5 r180
Q3_1: Top Overlay "1" at 358.175,206.075 h1.5 r180; Top Overlay "2" at 353.233,206.075 h1.5 r180; Top Overlay "3" at 347.783,206.075 h1.5 r180
Q4: Top Overlay "1" at 243.54,226.625 h1.5 r180; Top Overlay "2" at 241.25,226.625 h1.5 r180; Top Overlay "3" at 238.71,226.625 h1.5 r180
Q4_1: Top Overlay "1" at 358.25,231.075 h1.5 r180; Top Overlay "2" at 353.308,231.075 h1.5 r180; Top Overlay "3" at 347.858,231.075 h1.5 r180